# Altium PCB Scooter - Primary Board - PCB Layout.PcbDoc
Units mm, origin at the board's own origin, x right, y up, seen from the top; angles counter-clockwise.
Board outline 55.88 x 74.3 mm, 2 copper layers (Top Layer, Bottom Layer); 49 components, 37 nets, 159 pads, 30 vias.
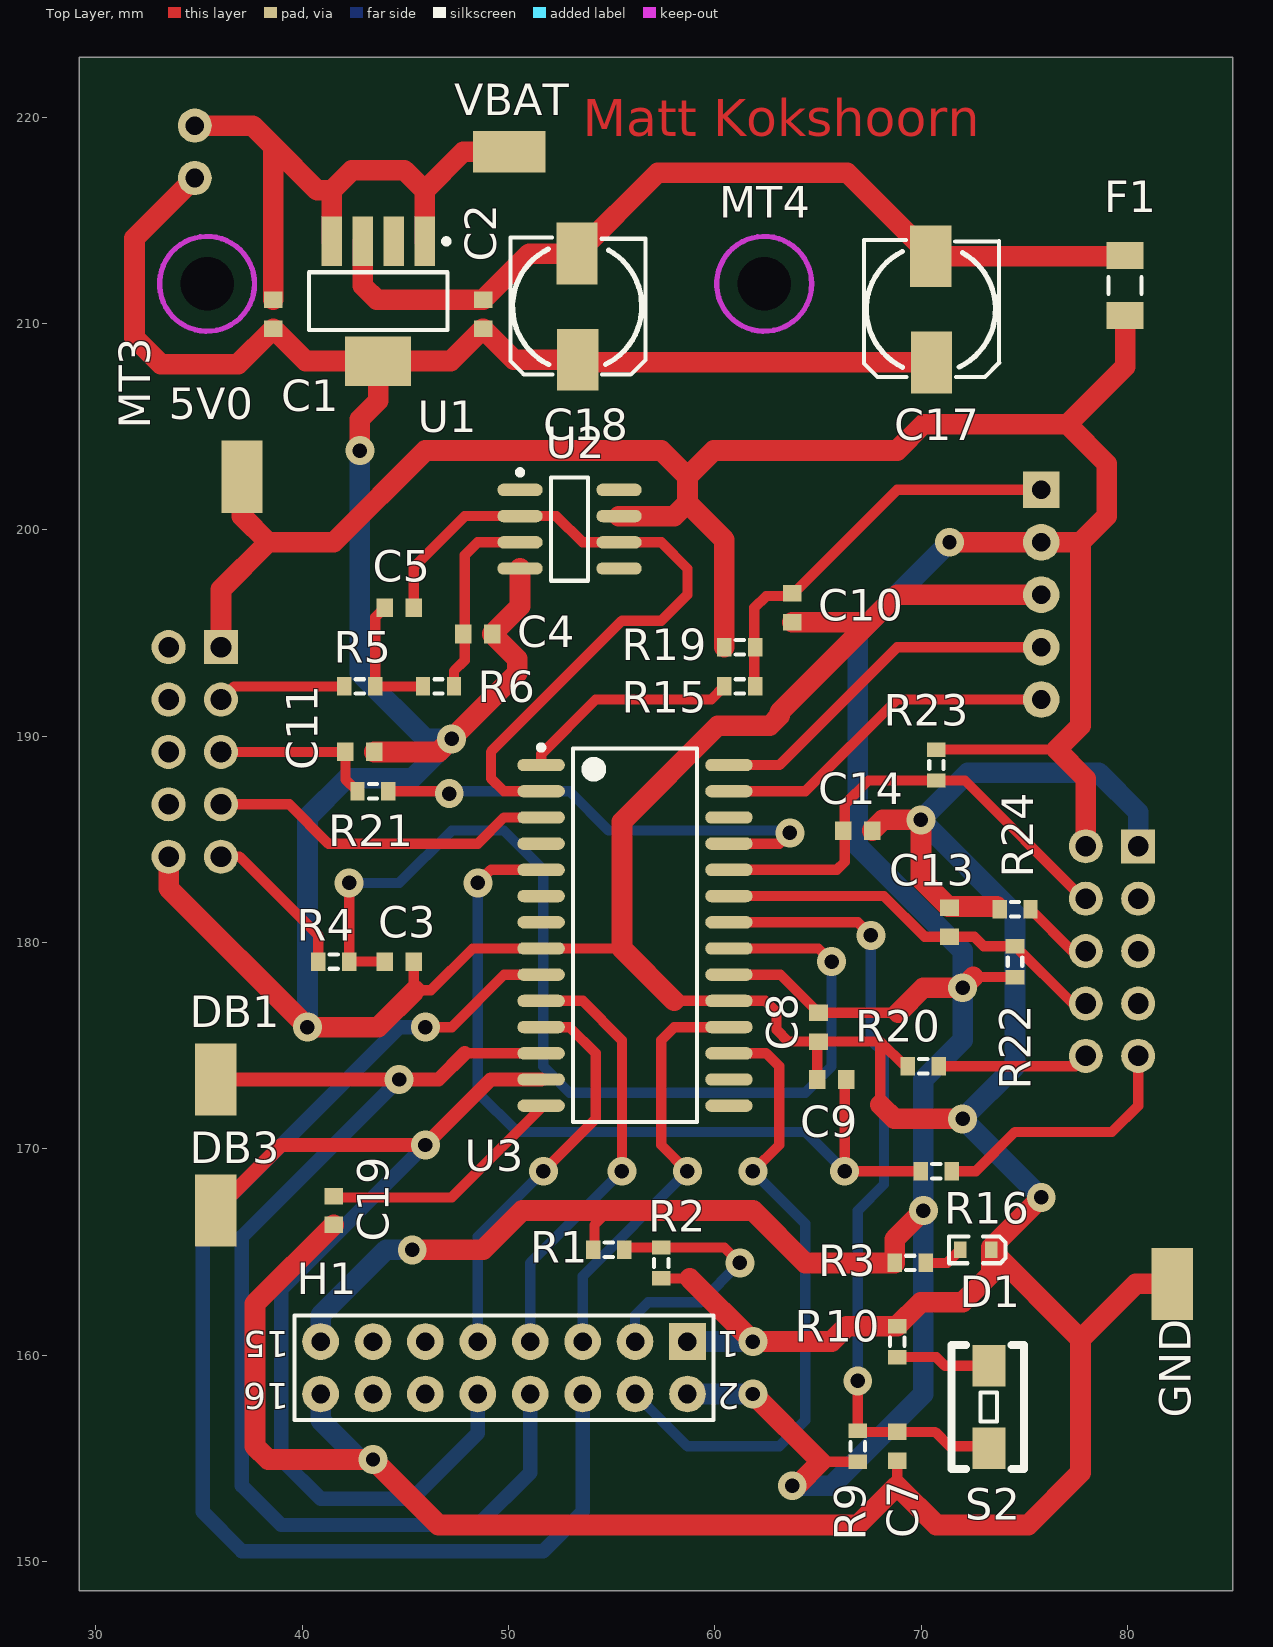
[diagram p0: Top Layer view]
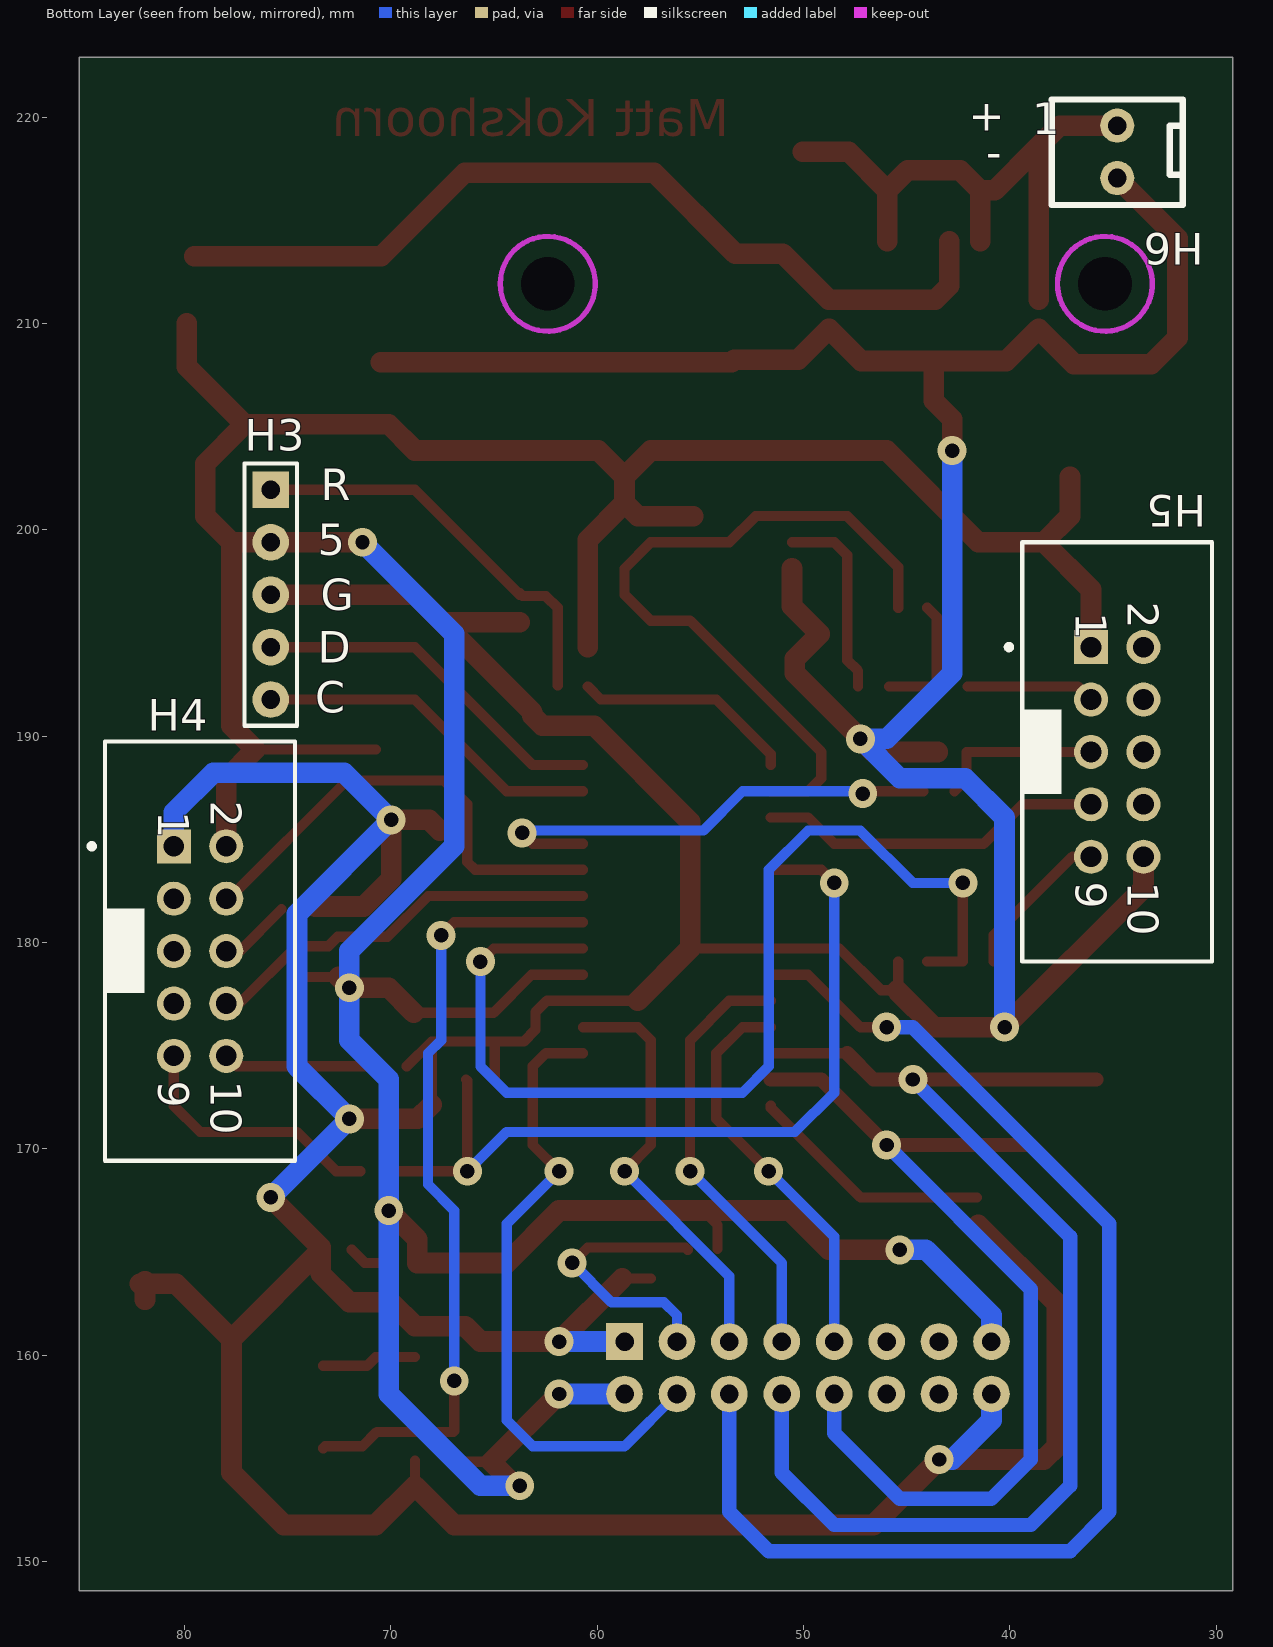
[diagram p1: Bottom Layer view, seen from below]

## Layer stack, top to bottom
Top Layer: signal copper 0.0356
Dielectric: dielectric 0.32, FR-4, Dk 4.8
Bottom Layer: signal copper 0.0356

## Board outline
29.21,222.885 29.21,148.59 85.09,148.59 85.09,222.885

## Design rules (kind name [scope] priority, off if disabled: settings)
Clearance [All] p1: gap=0.254
HoleSize [All] p1: absolutevalues=TRUE maxlimit=4 minlimit=0.3 maxpercent=80.000 minpercent=20.000
MinimumSolderMaskSliver [All] p1 off: minsoldermaskwidth=0.254
NetAntennae [All] p1 off: netantennaetolerance=0
PolygonConnect [All] p1: connectstyle=Relief reliefconductorwidth=0.254 reliefentries=4 polygonreliefangle="90 Angle" airgapwidth=0.254
RoutingVias [All] p1: holewidth=0.7 width=1.4 viastyle="Through Hole" minholewidth=0.711 minwidth=1.27 maxholewidth=0.711 maxwidth=1.27
SilkToSilkClearance [All] p1 off: silktosilkclearance=0.254
SilkToSolderMaskClearance SilkscreenOverComponentPads [IsPad] p1 off: minsilkscreentomaskgap=0.254 clearancetoexposedcopper=TRUE
SolderMaskExpansion [All] p1: expansion=0.102
Width [All] p1: maxlimit=2 minlimit=0.254 preferedwidth=0.5
23 further rules are at their usual default settings.

## Components (designator, comment, footprint, x,y, rotation, side; value= is the part's Value field where it differs from the comment)
5V0 "TP" TEST_POINT_3.5X2MM 37.084,202.565 r90 top
C1 "1uF" CAPC1608L 38.608,210.439 r90 top
C2 "1uF" CAPC1608L 48.768,210.439 r90 top
C3 "100nF" CAPC1608L 44.704,179.07 r180 top
C4 "100nF" CAPC1608L 48.514,194.945 r180 top
C5 "100nF" CAPC1608L 44.704,196.215 r180 top
C7 "10nF" CAPC1608L 68.834,155.575 r90 top
C8 "100nF" CAPC1608L 65.024,175.895 r90 top
C9 "100nF" CAPC1608L 65.659,173.355 r0 top
C10 "100nF" CAPC1608L 63.754,196.215 r90 top
C11 "220nF" CAPC1608L 42.799,189.23 r180 top
C13 "10nF" CAPC1608L 71.374,180.975 r90 top
C14 "10nF" CAPC1608L 66.929,185.42 r180 top
C17 "100uF/16V" NICH-1 70.485,210.693 r270 top
C18 "100uF/16V" NICH-1 53.34,210.82 r270 top
C19 "100nF" CAPC1608L 41.529,167.005 r90 top
D1 "#NAME?" LED0.8X1.6 72.644,165.1 r0 top
DB1 "TP" TEST_POINT_3.5X2MM 35.814,173.355 r90 top
DB3 "TP" TEST_POINT_3.5X2MM 35.814,167.005 r90 top
F1 "1A" RESC3216N 79.883,211.836 r270 top
GND "TP" TEST_POINT_3.5X2MM 82.169,163.449 r90 top
H1 "Header 8X2" HDR2X8 58.674,160.655 r180 top
H3 "Header 5" HDR1X5 75.819,201.93 r270 bottom
H4 "Header 5X2 Vert" IDC2.54-V10D 79.248,179.578 r270 bottom
H5 "Header 5X2 Vert" IDC2.54-V10D 34.798,189.23 r270 bottom
H6 "2 Pin Molex KK HDR" MOLEX_KK_2_HDR 34.798,219.583 r270 bottom
MT3 "M2.6 NPTH" MNT-HOLE_2.6mm_NPTH 35.394,211.915 r0 top
MT4 "M2.6 NPTH" MNT-HOLE_2.6mm_NPTH 62.394,211.915 r0 top
R1 "10K" RESC1608L 54.864,165.1 r180 top
R2 "10K" RESC1608L 57.404,164.465 r90 top
R3 "147" RESC1608L 69.469,164.465 r180 top
R4 "20K" RESC1608L 41.529,179.07 r180 top
R5 "33k" RESC1608L 42.799,192.405 r180 top
R6 "33k" RESC1608L 46.609,192.405 r180 top
R9 "10K" RESC1608L 66.929,155.575 r270 top
R10 "470R" RESC1608L 68.834,160.655 r90 top
R15 "100R" RESC1608L 61.214,192.405 r180 top
R16 "10k" RESC1608L 70.739,168.91 r0 top
R19 "10k" RESC1608L 61.214,194.31 r180 top
R20 "470R" RESC1608L 70.104,173.99 r180 top
R21 "10K" RESC1608L 43.434,187.325 r0 top
R22 "10K" RESC1608L 74.549,179.07 r270 top
R23 "10K" RESC1608L 70.739,188.595 r90 top
R24 "470R" RESC1608L 74.549,181.61 r180 top
S2 "EVQPNF05M" EVQPNF05M 73.279,157.48 r90 top
U1 "LP38692" SOT223-5N 43.688,211.074 r270 top
U2 "uA741C" SO8_N 52.959,200.025 r0 top
U3 "PIC18F25K50-I/SO" SOIC-SO28_N 56.134,180.34 r0 top
VBAT "TP" TEST_POINT_3.5X2MM 50.038,218.313 r180 top

## Footprints (in the part's own frame and the unit in brackets; to place one, negate y for a bottom-side part, rotate by r counter-clockwise, add the part's x,y. Pads: shape width x height; smd on the part's side, far side on the other; paste and mask are expansions set on the pad)
CAPC1608L [mm] "Chip Capacitor, Body 1.6x0.8mm, IPC High Density"
  rect 0.8x0.9 smd: 1(-0.7,0) 2(0.7,0)
  body extent -0.87,-0.48 0.87,0.48, height 0.85
EVQPNF05M [mm] "Panansonic light touch SMD push button switch"
  rect 2x1.6 smd: 1(-2,0) 2(2,0)
  silkscreen extent -3,-1.7 3,1.8, body extent -3,-1.7 3,1.8, height 5
HDR1X5 [mil] "Connector; Header; 5 Position"
  rect 70x70 hole 35.43: 1(0,0)
  round 70 hole 35.43: 2(100,0) 3(200,0) 4(300,0) 5(400,0)
  silkscreen extent -50,-50 450,50
HDR2X8 [mil] "Connector; Header; 8x2 Position"
  rect 70x70 hole 35.43: 1(0,0)
  round 70 hole 35.43: 2(0,100) 3(100,0) 4(100,100) 5(200,0) 6(200,100) 7(300,0) 8(300,100) 9(400,0) 10(400,100) 11(500,0) 12(500,100) 13(600,0) 14(600,100) 15(700,0) 16(700,100)
  silkscreen extent -50,-50 750,150
IDC2.54-V10D [mm] "Connector; IDC, Low Profile Male Header, Thru-Hole; 10 Position; Vertical; Pitch 2.54 mm; Body 20.32 x 9.2 x 9.45 mm (LxWxH)"
  rect 1.65x1.65 hole 1: 1(-5.08,-1.27)
  round 1.65 hole 1: 2(-5.08,1.27) 3(-2.54,-1.27) 4(-2.54,1.27) 5(0,-1.27) 6(0,1.27) 7(2.54,-1.27) 8(2.54,1.27) 9(5.08,-1.27) 10(5.08,1.27)
  silkscreen extent -10.16,-5.38 10.16,4.6, body extent -10.16,-4.6 10.16,4.6, height 9.45
LED0.8X1.6 [mm] "LED 0603"
  rect 0.6x0.8 smd: 1(-0.75,0) 2(0.75,0)
  silkscreen extent -1.3,-0.65 1.45,0.65
MNT-HOLE_2.6mm_NPTH [mm] "Mounting Hole 2.6mm non plated"
  round 0 hole 2.6 unplated: 1(0,0)
  Keep-Out Layer circle w0.254: c0,0 r2.3
MOLEX_KK_2_HDR [mil] "MOLEX_KK_2_HDR"
  round 65 hole 35.43: 1(0,0) 2(100,0)
  silkscreen extent -50,-125 152,125, body extent -44,-121 146,119, height 630
NICH-1 [mm] "Electrolytic capacitor"
  rect 3x2 smd: 1(-2.561,-0.022) 2(2.584,0.011)
  silkscreen extent -3.34,-3.25 3.3,3.3, body extent -3.2,-3.21 3.2,3.2, height 5.3
RESC1608L [mm] "Chip Resistor, Body 1.6x0.8mm, IPC High Density"
  rect 0.7x0.9 smd: 1(-0.75,0) 2(0.75,0)
  silkscreen extent -0.2,-0.35 0.2,0.35, body extent -0.85,-0.48 0.85,0.48, height 0.9
RESC3216N [mm] "Chip Resistor, Body 3.2x1.6mm, IPC Medium Density"
  rect 1.3x1.8 smd: 1(-1.45,0) 2(1.45,0)
  silkscreen extent -0.4,-0.8 0.4,0.8, body extent -1.68,-0.87 1.68,0.87, height 0.71
SO8_N [mm] "SOIC, 8-Leads, Body 4.9x3.9mm, Pitch 1.27mm, IPC Medium Density"
  oval 2.2x0.6 smd: 1(-2.4,1.905) 2(-2.4,0.635) 3(-2.4,-0.635) 4(-2.4,-1.905) 5(2.4,-1.905) 6(2.4,-0.635) 7(2.4,0.635) 8(2.4,1.905)
  silkscreen extent -2.52,-2.5 0.9,2.88, body extent -2,-2.5 2,2.5, height 1.75
SOIC-SO28_N [mm] "SOIC, 28-Leads, Body 17.9x7.5mm, Pitch 1.27mm, IPC Medium Density"
  oval 2.3x0.6 smd: 1(-4.55,8.255) 2(-4.55,6.985) 3(-4.55,5.715) 4(-4.55,4.445) 5(-4.55,3.175) 6(-4.55,1.905) 7(-4.55,0.635) 8(-4.55,-0.635) 9(-4.55,-1.905) 10(-4.55,-3.175) 11(-4.55,-4.445) 12(-4.55,-5.715) 13(-4.55,-6.985) 14(-4.55,-8.255) 15(4.55,-8.255) 16(4.55,-6.985) 17(4.55,-5.715) 18(4.55,-4.445) 19(4.55,-3.175) 20(4.55,-1.905) 21(4.55,-0.635) 22(4.55,0.635) 23(4.55,1.905) 24(4.55,3.175) 25(4.55,4.445) 26(4.55,5.715) 27(4.55,6.985) 28(4.55,8.255)
  silkscreen extent -4.67,-9.05 3,9.23, body extent -3.8,-9.06 3.8,9.06, height 2.65
SOT223-5N [mm] "SOT223, 5-Leads, Body 6.5x3.5mm, Pitch 1.5mm, Lead Span 7mm, IPC Medium Density"
  rect 2.4x1 smd: 1(-2.9,2.25) 2(-2.9,0.75) 3(-2.9,-0.75) 4(-2.9,-2.25)
  rect 2.4x3.2 smd: 5(2.9,0)
  silkscreen extent -3.02,-3.35 1.4,3.43, body extent -1.85,-3.35 1.85,3.35, height 1.8
TEST_POINT_3.5X2MM [mm] "Test Point Pad"
  rect 3.5x2 smd: 1(0,0)
  body extent -1.75,-1.01 1.75,1, height 2

## Part data
5V0 DB1 DB3 GND VBAT: library part TP_TESTPOINT, "Test-Point SMD"
C1 C2: library part CC_1uF_0603, "CAP CER 1uF Y5V -20% +80% 16V 0603"
C3 C4 C5 C8 C9 C10 C19: library part CC_100nF_0603, "CAP CER 100nF X7R +-10% 50V 0603"
C7 C13 C14: library part CC_10nF_0603, "CAP CER 10nF X7R +-10% 50V 0603"
C11: library part CC_220nF_0603, "CAP CER 220nF Y5V -20% +80% 16V 0603"
C17 C18: library part CA_100uF_16V_SMD, "Nichcon WX series  SMT Aluminium Electrolytic Cap"
D1: library part DL_TLMG1100, "LED Green 0603"
F1: library part FS_Fuse_1.0A_SMD_1206, "Fuse 1.0A Very Fast Acting 1206"
H1: "Header, 8-Pin, Dual row"
H3: "Header, 5-Pin"
H4 H5: library part JA_HDR_IDC_5X2_VERT, "IDC Header, 2,54mm, 10-Pin, Vert"
H6: library part JA_MOLEX_KK_2POS, "CONN HEADER 2POS 2.54mm VERT_Thru Hole"
MT3 MT4: library part MC_M2.6_HOLE, "Fixing M2.6 Mount Hole NPTH"
R1 R2 R3 R4 R5 R6 R9 R16 R21 R22 R23: library part RS_10K, "RES 10.0K OHM 1/10W 5% 0603 SMD"
R10 R15 R19 R20 R24: library part RS_470R, "RES 470 OHM 1/10W 5% 0603 SMD"
S2: library part WS_EVQPNF05M, "Panasonic 6 x 3.5mm SMD Light Touch Switch Type"
U1: library part MCP1826-ADJE/AT, "1000 mA, Low Voltage, Low Quiescent Current LDO Regulator, 5-Pin TO-220, Extended Temperature"
U2: library part LM101AJG, "High Performance Operational Amplifier"
U3: library part PIC18F25K20T-I/SO, "Flash Microcontroller with 10-Bit A/D and nanoWatt Technology, 32K Flash, 28-Pin SOIC, Industrial Temperature Range, Tape and Reel"

## Via types
v1: diameter 1.4, hole 0.7, Top Layer to Bottom Layer, 30 vias

## Nets (pads, with @x,y where several pads share a name; then routed paths per layer and width w, separated by ;. In a path a pad name is that pad's centre, name@x,y a point inside that pad or via, vN(x,y) a via of type N, cw(c..) or ccw(c..) an arc to the next point about the centre after c; other vN are vias at no path point)
5V0: 5V0.1 C8.2 F1.2 H1.2 H1.15 H3.2 H4.2 H5.1 R1.2 R3.2 R9.2 R19.2 R22.2 R23.2 U2.7 U3.20 | length 224
  Top Layer w0.5: R1.2@54.165,165.152 54.165,166.306 54.864,167.005 ; U3.20 63.184,178.435 C8.2 68.899,176.595 ; 65.139,154.825 R9.2 ; R23.2 76.569,189.345 ; 72.529,178.32 R22.2
  Top Layer w1: H5.1 36.068,197.104 38.354,199.39 ; 5V0.1 37.084,200.66 38.354,199.39 ; v1(45.339,165.1) 48.768,165.1 50.673,167.005 54.864,167.005 61.849,167.005 64.389,164.465 R3.2 68.719,165.62 v1(70.104,167.005) ; U2.7 58.039,200.66 58.674,201.295 ; R19.2 60.464,199.505 58.674,201.295 ; v1(61.849,158.115) 65.139,154.825 63.984,153.67 v1(63.754,153.67) ; 68.899,176.595 70.104,177.8 v1(72.009,177.8) 72.529,178.32 ; v1(71.374,199.39) H3.2 77.724,199.39 ; H4.2 77.978,187.936 76.569,189.345 77.724,190.5 77.724,199.39 ; F1.2@79.883,210.005 79.883,207.899 77.089,205.105 ; 38.354,199.39 41.529,199.39 45.974,203.835 57.404,203.835 58.674,202.565 ; 58.674,201.295 58.674,202.565 ; 58.674,202.565 59.944,203.835 68.834,203.835 70.104,205.105 77.089,205.105 ; 77.089,205.105 78.994,203.2 78.994,200.66 77.724,199.39
  Bottom Layer w1: H1.15 40.894,161.925 44.069,165.1 v1(45.339,165.1) ; H1.2 v1(61.849,158.115) ; v1(63.754,153.67) 65.659,153.67 70.104,158.115 v1(70.104,167.005) 70.104,173.355 72.009,175.26 v1(72.009,177.8) 72.009,179.59 66.929,184.67 66.929,194.945 v1(71.374,199.39)
"ACCEL SIGNAL": H4.9 R16.2 | length 12.8
  Top Layer w0.5: R16.2 72.644,168.91 74.549,170.815 79.248,170.815 80.518,172.085 H4.9
"BOOST SIGNAL": C14.2 H4.4 R23.1 U3.24 | length 23.1
  Top Layer w0.5: U3.24 65.913,183.515 66.294,183.896 66.294,186.69 67.449,187.845 R23.1 72.124,187.845 77.851,182.118 H4.4
"BOOST SIGNAL RTRN": H4.6 R24.1 | length 3.5
  Top Layer w0.5: R24.1 77.331,179.578 H4.6
"BREAK SIGNAL": C13.1 H4.8 R22.1 U3.23 | length 19.5
  Top Layer w0.5: U3.23 68.199,182.245 70.169,180.275 C13.1 72.582,180.275 73.037,179.82 R22.1 74.562,179.82 77.344,177.038 H4.8
"BREAK SIGNAL RTRN": H4.10 R20.1 | length 7.3
  Top Layer w0.5: R20.1 77.47,173.99 H4.10
"CURRENT SIGNAL": H5.3 R5.2 | length 6.2
  Top Layer w0.5: H5.3 36.703,192.405 R5.2
DB0: H1.7 U3.10 | length 21.2
  Top Layer w0.5: U3.10 53.594,177.165 55.499,175.26 v1(55.499,168.91)
  Bottom Layer w0.5: H1.7 51.054,164.465 v1(55.499,168.91)
DB1: DB1.1 H1.8 U3.12 | length 58.8
  Top Layer w0.5: 47.879,174.625 U3.12
  Top Layer w0.7: DB1.1 v1(44.704,173.355) 46.609,173.355 47.879,174.625
  Bottom Layer w0.7: v1(44.704,173.355) 37.084,165.735 37.084,153.67 38.989,151.765 48.514,151.765 51.054,154.305 H1.8
DB2: H1.9 U3.11 | length 19.5
  Top Layer w0.5: U3.11 52.959,175.895 54.229,174.625 54.229,171.45 v1(51.689,168.91)
  Bottom Layer w0.5: H1.9 48.514,165.735 v1(51.689,168.91)
DB3: DB3.1 H1.10 U3.13 | length 49.3
  Top Layer w0.7: DB3.1 38.989,170.18 v1(45.974,170.18) 49.149,173.355 U3.13
  Bottom Layer w0.7: v1(45.974,170.18) 38.989,163.195 38.989,154.94 40.894,153.035 45.339,153.035 48.514,156.21 H1.10@48.514,157.353
"FILTERED ACCEL SIGNAL": C9.2 R16.1 U3.5 | length 41
  Top Layer w0.5: v1(48.514,182.88) 49.149,183.515 U3.5 ; C9.2 66.294,173.29 v1(66.294,168.91) R16.1
  Bottom Layer w0.5: v1(48.514,182.88) 48.514,172.72 50.419,170.815 64.389,170.815 v1(66.294,168.91)
"FILTERED CURRENT SIGNAL": C5.1 U2.2 U2.6 U3.2 | length 35.2
  Top Layer w0.5: C5.1 45.404,198.185 47.879,200.66 U2.2 52.324,200.66 53.594,199.39 U2.6 57.404,199.39 58.674,198.12 58.674,196.85 57.404,195.58 55.499,195.58 49.149,189.23 49.149,187.96 49.784,187.325 U3.2
"FILTERED MSC PWM": C11.2 H5.5 R21.1 | length 8.2
  Top Layer w0.5: H5.5 C11.2 42.099,187.91 R21.1
"FILTERED SPEED SIGNAL": C3.2 R4.1 U3.21 | length 51.7
  Top Layer w0.5: v1(42.279,182.88) R4.1 C3.2 ; U3.21 65.024,179.705 v1(65.659,179.07)
  Bottom Layer w0.5: v1(42.279,182.88) 44.704,182.88 47.244,185.42 49.784,185.42 51.689,183.515 51.689,173.99 52.959,172.72 64.389,172.72 65.659,173.99 v1(65.659,179.07)
GND: C1.1 C2.1 C3.1 C4.1 C7.1 C8.1 C9.1 C10.1 C11.1 C13.2 C14.1 C17.2 C18.2 C19.1 D1.2 GND.1 H1.1 H1.16 H3.3 H4.1 H5.10 H6.2 R2.1 R10.2 R20.2 R24.2 U1.5 U2.4 U3.8 U3.19 | length 349.2
  Top Layer w0.5: C3.1 45.404,177.735 45.466,177.673 46.228,177.673 48.26,179.705 U3.8 55.499,179.705 ; R2.1 58.789,163.715 ; 58.039,177.165 U3.19 62.437,177.165 62.992,176.61 62.992,175.768 63.565,175.195 C8.1 68.019,175.195 ; C9.1 C8.1@64.959,175.13 ; 68.019,172.138 68.019,175.195 ; 68.834,153.67 C7.1 ; R20.2@69.224,173.99 68.019,175.195
  Top Layer w1: H5.10 33.528,182.626 v1(40.259,175.895) 43.688,175.895 45.466,177.673 ; H6.2 31.877,214.122 31.877,209.296 33.147,208.026 36.895,208.026 C1.1 40.173,208.174 U1.5 ; C19.1 37.719,162.495 37.719,155.575 38.354,154.94 v1(43.434,154.94) 46.609,151.765 66.929,151.765 68.834,153.67 70.739,151.765 75.184,151.765 77.724,154.305 77.724,160.77 ; v1(42.799,203.835) 42.799,205.359 43.688,206.248 U1.5 ; C11.1 46.609,189.23 v1(47.244,189.865) 50.419,193.04 50.419,193.74 C4.1 50.559,196.29 U2.4 ; C18.2 50.271,208.236 C2.1 47.203,208.174 U1.5 ; C18.2@53.478,208.109 C17.2 ; 58.039,177.165 55.499,179.705 55.499,185.852 60.142,190.494 62.656,190.494 63.14,190.978 63.14,191.156 67.499,195.515 ; 58.789,163.715 v1(61.849,160.655) 65.659,160.655 66.409,161.405 R10.2 69.989,162.56 72.009,162.56 73.394,163.945 D1.2 77.724,160.77 ; C10.1 67.499,195.515 ; C14.1 68.149,185.94 v1(69.989,185.94) 69.989,183.06 71.312,181.737 R24.2@73.672,181.737 ; 68.019,172.138 68.707,171.45 v1(72.009,171.45) ; D1.2@73.394,165.215 v1(75.819,167.64) ; H3.3 68.834,196.85 67.499,195.515 ; GND.1@81.915,162.687 GND.1@81.915,163.449 ; GND.1@81.915,163.576 GND.1@81.915,163.449 ; GND.1 GND.1@81.915,163.449 ; 77.724,160.77 80.403,163.449 GND.1@81.915,163.449
  Bottom Layer w1: v1(40.259,175.895) 40.259,186.055 42.164,187.96 45.339,187.96 v1(47.244,189.865) 45.974,189.865 42.799,193.04 v1(42.799,203.835) ; H1.16 40.894,156.845 42.799,154.94 v1(43.434,154.94) ; H1.1 v1(61.849,160.655) ; v1(75.819,167.64) v1(72.009,171.45) 74.549,173.99 74.549,181.38 v1(69.989,185.94) 72.263,188.214 78.613,188.214 80.518,186.309 H4.1
"GPIO 0": U3.15
"GPIO 1": U3.16
"ICSP CLOCK": H3.5 U3.27 | length 17
  Top Layer w0.5: U3.27 64.389,187.325 68.834,191.77 H3.5
"ICSP DATA": H3.4 U3.28 | length 17.5
  Top Layer w0.5: U3.28 63.119,188.595 68.834,194.31 H3.4
"LCD ADJ": H1.3 R1.1 R2.2 | length 13.4
  Top Layer w0.5: R1.1 55.729,165.215 R2.2 60.464,165.215 v1(61.214,164.465)
  Bottom Layer w0.5: H1.3 56.134,161.925 56.769,162.56 59.309,162.56 v1(61.214,164.465)
"LCD E": H1.6 U3.9 | length 61.1
  Top Layer w0.5: v1(45.974,175.895) 47.244,175.895 49.784,178.435 U3.9
  Bottom Layer w0.7: v1(45.974,175.895) 44.704,175.895 35.179,166.37 35.179,152.4 37.084,150.495 51.689,150.495 53.594,152.4 H1.6
"LCD R/W": H1.5 U3.18 | length 20.8
  Top Layer w0.5: v1(58.674,168.91) 57.404,170.18 57.404,175.26 58.039,175.895 U3.18
  Bottom Layer w0.5: H1.5 53.594,163.83 v1(58.674,168.91)
"LCD RS": H1.4 U3.17 | length 31.3
  Top Layer w0.5: U3.17 62.484,174.625 63.119,173.99 63.119,170.18 v1(61.849,168.91)
  Bottom Layer w0.5: H1.4 58.674,155.575 63.119,155.575 64.389,156.845 64.389,166.37 v1(61.849,168.91)
"MSC PWM": R21.2 U3.25 | length 23.5
  Top Layer w0.5: R21.2 v1@47.014,187.325 ; U3.25 63.119,184.785 v1@63.754,185.42
  Bottom Layer w0.5: v1@47.244,187.325 52.959,187.325 54.864,185.42 v1@63.754,185.42
  other v1: 63.639,185.305 47.129,187.21
NetC4_2: C4.2 R6.1 U2.3 | length 9.5
  Top Layer w0.5: R6.1 47.359,193.155 47.879,193.675 47.879,198.755 48.514,199.39 U2.3
NetC5_2: C5.2 R5.1 R6.2 | length 6.3
  Top Layer w0.5: C5.2 43.549,195.76 R5.1 R6.2
NetC19_2: C19.2 U3.14 | length 11.9
  Top Layer w0.5: C19.2@41.594,167.64 47.244,167.64 51.584,171.98 U3.14
NetD1_1: D1.1 R3.1 | length 1.9
  Top Layer w0.5: R3.1 71.259,164.465 D1.1
NetR10_1: R10.1 S2.2 | length 4.6
  Top Layer w0.5: R10.1 70.727,159.905 71.152,159.48 S2.2
NetR15_2: R15.2 U3.1 | length 10.8
  Top Layer w0.5: U3.1 51.584,189.125 54.229,191.77 59.829,191.77 R15.2
"REGEN BRK": H5.7 U3.3 | length 16.8
  Top Layer w0.5: H5.7 39.37,186.69 41.275,184.785 48.514,184.785 49.784,186.055 U3.3
RESET: C10.2 H3.1 R15.1 R19.1 | length 20.1
  Top Layer w0.5: R15.1@61.914,192.455 61.914,196.215 62.484,196.785 63.624,196.785 C10.2 ; C10.2@63.754,196.85 68.834,201.93 H3.1
"SPEED SIGNAL": H5.9 R4.2 | length 7.6
  Top Layer w0.5: H5.9 36.969,184.15 40.779,180.34 R4.2
STANDBY: C7.2 R9.1 S2.1 U3.22 | length 38.6
  Top Layer w0.5: U3.22 66.929,180.975 v1(67.564,180.34) ; R9.1 v1(66.929,158.75) ; R9.1@66.979,156.275 C7.2 70.674,156.275 71.374,155.575 73.184,155.575 S2.1
  Bottom Layer w0.5: v1(66.929,158.75) 66.929,167.005 68.199,168.275 68.199,174.625 67.564,175.26 v1(67.564,180.34)
VBAT: C1.2 H6.1 U1.1 U1.4 VBAT.1 | length 30.5
  Top Layer w0.8: U1.4@41.417,213.995 U1.4
  Top Layer w1: H6.1 37.592,219.583 38.608,218.567 ; C1.2 38.608,218.567 ; U1.4 41.438,216.444 ; U1.1 45.938,216.444 ; VBAT.1 47.807,218.313 45.938,216.444 ; 38.608,218.567 40.731,216.444 41.438,216.444 ; 41.438,216.444 42.418,217.424 44.958,217.424 45.938,216.444
VREG: C2.2 C17.1 C18.1 F1.1 U1.3 | length 43.3
  Top Layer w1: U1.3 42.938,211.824 43.623,211.139 C2.2 51.01,213.381 C18.1 57.234,217.297 66.42,217.297 C17.1 F1.1@79.534,213.254
pads on no net: H1.11 H1.12 H1.13 H1.14 H4.3 H4.5 H4.7 H5.2 H5.4 H5.6 H5.8 MT3.1 MT4.1 U1.2 U2.1 U2.5 U2.8 U3.4 U3.6 U3.7 U3.26

## Other copper
Top Layer:
  text "Matt Kokshoorn" at 53.594,219.075 h1.78

## Silkscreen, mask and mechanical layers (free items; w line width, h text height)
Bottom Overlay:
  text "+" at 40.259,219.329 h1.52
  text "-" at 40.386,217.551 h1.52
  text "R" at 73.406,201.422 h1.52
  text "5" at 73.533,198.755 h1.52
  text "G" at 73.406,196.088 h1.52
  text "D" at 73.533,193.548 h1.52
  text "C" at 73.66,191.135 h1.52
Mechanical 1:
  lines w0.5: 29.845,149.225 61.845,149.225 71.755,149.225 84.582,149.225 84.582,222.25 29.845,222.25 29.845,207.225 29.845,149.225

## Text inside footprints (layer, text, board x,y; h text height)
H1: Top Overlay "16" at 39.37,158.623 h1.27 r180; Top Overlay "15" at 39.37,161.163 h1.27 r180; Top Overlay "1" at 61.214,161.163 h1.27 r180; Top Overlay "2" at 61.214,158.623 h1.27 r180
H4: Bottom Overlay "9" at 81.268,173.298 h1.5 r90; Bottom Overlay "10" at 78.728,173.298 h1.5 r90; Bottom Overlay "1" at 81.268,186.358 h1.5 r90; Bottom Overlay "2" at 78.728,186.858 h1.5 r90
H5: Bottom Overlay "9" at 36.818,182.95 h1.5 r90; Bottom Overlay "10" at 34.278,182.95 h1.5 r90; Bottom Overlay "1" at 36.818,196.01 h1.5 r90; Bottom Overlay "2" at 34.278,196.51 h1.5 r90
H6: Bottom Overlay "1" at 38.925,219.169 h1.52